# Altium PCB PCB1.PcbDoc (part 2 of 2)
Units mm, origin at the board's own origin, x right, y up, seen from the top; angles counter-clockwise.
Board outline 150 x 44.29 mm, 2 copper layers (Component Side, Solder Side), stack 0.772 mm thick; 82 components, 158 nets, 515 pads, 151 vias.
Unrouted connection lines stored in the file: 1.
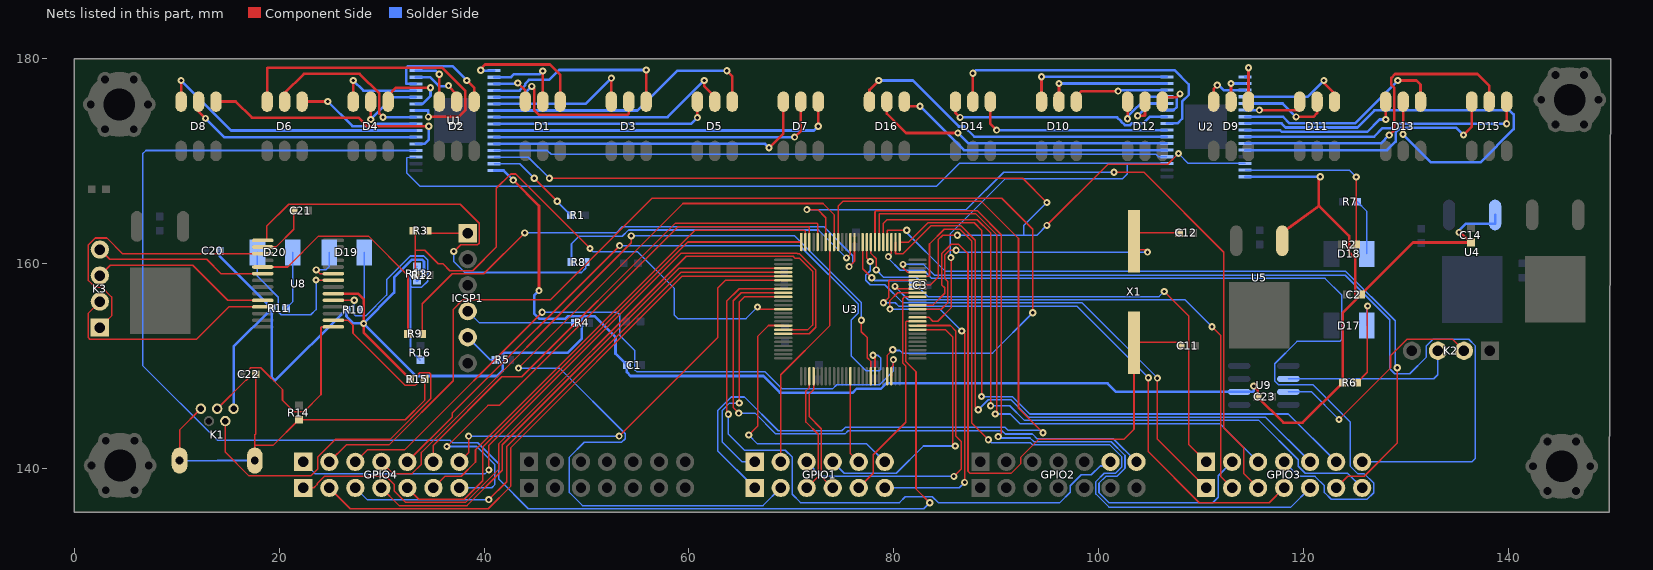
[diagram p2: the nets of this part, all layers, seen from the top]

## Via types
v1: diameter 0.7, hole 0.33, Component Side to Solder Side, 151 vias

## Nets (pads, with @x,y where several pads share a name; then routed paths per layer and width w, separated by ;. In a path a pad name is that pad's centre, name@x,y a point inside that pad or via, vN(x,y) a via of type N, cw(c..) or ccw(c..) an arc to the next point about the centre after c; other vN are vias at no path point) (continued)
MS13: GPIO2.12 U3.8 | length 63.8
  Component Side w0.152: v1(63.856,145.288) 63.678,145.466 63.678,156.312 64.916,157.55 U3.8@69.218,157.55
  Solder Side w0.152: v1(63.856,145.288) 63.838,145.27 63.838,143.365 65.42,141.783 69.406,141.783 70.079,141.11 70.079,137.477 70.895,136.661 80.558,136.661 81.133,137.236 83.757,137.236 84.331,136.661 96.225,136.661 97.231,137.668 97.231,138.303 98.298,139.37 99.289,139.37 100.152,140.233 100.749,140.233 GPIO2.12@101.155,140.64
MS14: GPIO2.14 U3.9 | length 57.5
  Component Side w0.152: v1(64.867,145.4) 64.328,145.939 64.328,156.362 65.115,157.15 U3.9@69.218,157.15
  Solder Side w0.152: v1(64.867,145.4) 66.446,145.4 68.483,143.363 75.233,143.363 75.556,143.686 90.553,143.686 90.882,143.358 93.534,143.358 93.986,142.906 101.429,142.906 GPIO2.14@103.695,140.64
NetC3_1: C3.1 U3.85 | length 8.2
  Component Side w0.152: U3.85@76.968,162.1 76.968,159.492 v1(77.847,158.614)
  Solder Side w0.152: v1(77.847,158.614) 78.113,158.348 81.428,158.348 C3.1@81.89,157.886
NetC11_1: C11.1 U3.64 X1.1 | length 63.5
  Component Side w0.152: U3.64@82.318,155.95 83.83,155.95 84.97,157.09 84.97,157.634 84.665,157.939 84.665,160.949 85.604,161.888 86.315,161.888 87.249,160.954 87.249,139.726 87.465,139.51 91.453,139.51 92.38,140.437 92.38,141.072 94.176,142.868 102.494,142.868 103.454,143.827 X1.1@103.454,152.286 103.454,152.298 108.026,152.298 C11.1@108.026,151.968
NetC12_1: C12.1 U3.63 X1.2 | length 35.5
  Component Side w0.152: U3.63@82.318,155.55 84.645,155.55 85.286,156.19 85.286,158.225 84.981,158.53 84.981,160.826 85.451,161.297 v1(86.086,161.297) ; v1(104.775,161.112) 104.521,161.366 103.454,161.366 X1.2@103.454,162.192 103.454,162.992 C12.1@107.848,162.992
  Solder Side w0.152: v1(86.086,161.297) 86.271,161.112 v1(104.775,161.112)
NetC21_1: C21.1 U8.2 | length 5.6
  Component Side w0.152: U8.2@18.394,161.614 19.685,161.614 21.412,163.341 C21.1@21.412,165.176
NetC22_1: C22.1 K1.5 K1.M1 K1.M2 R14.1 R15.2 | length 42.2
  Component Side w0.152: K1.M1@10.27,140.771 10.27,143.746 K1.5@12.345,145.821 ; K1.M2@17.62,140.771 17.62,142.215 ; C22.1@17.704,149.2 17.704,143.365 17.62,143.281 17.62,142.215 ; R15.2@34.188,148.717 34.188,146.634 32.309,144.755 R14.1@21.92,144.755 19.406,142.24 17.645,142.24 17.62,142.215
  Solder Side w0.152: K1.M1@10.27,140.771 10.27,140.767 13.945,140.767 13.949,140.771 K1.M2@17.62,140.771
NetD1_4: D1.4 U1.19 | length 4.5
  Component Side w0.254: v1(43.289,177.627) 44.027,176.89 D1.4@44.027,175.81
  Solder Side w0.254: U1.19@40.983,177.54 43.202,177.54 v1(43.289,177.627)
NetD1_5: D1.5 U1.18 | length 8
  Component Side w0.254: D1.5@45.727,175.81 v1(45.727,178.803)
  Solder Side w0.254: U1.18@40.983,178.19 42.627,178.19 42.924,178.487 45.41,178.487 v1(45.727,178.803)
NetD1_6: D1.6 U1.17 | length 12.6
  Component Side w0.254: v1(39.675,178.867) 39.849,178.867 39.698,179.017 40.114,179.433 46.431,179.433 47.429,178.435 D1.6@47.429,175.81
  Solder Side w0.254: v1(39.675,178.867) 39.702,178.84 U1.17@40.983,178.84
NetD2_4: D2.4 U1.16 | length 5.1
  Component Side w0.254: D2.4@35.627,175.81 v1(35.627,178.486)
  Solder Side w0.254: U1.16@33.338,178.84 35.273,178.84 v1(35.627,178.486)
NetD2_5: D2.5 U1.15 | length 5.5
  Component Side w0.254: v1(36.525,177.368) 36.525,177.317 37.327,176.516 D2.5@37.327,175.81
  Solder Side w0.254: U1.15@33.338,178.19 34.713,178.19 35.585,177.317 36.525,177.317 v1(36.525,177.368)
NetD2_6: D2.6 U1.14 | length 11.4
  Component Side w0.254: v1(38.318,177.876) 39.029,177.165 D2.6@39.029,175.81
  Solder Side w0.254: U1.14@33.338,177.54 32.436,177.54 32.418,177.558 32.418,179.107 32.584,179.273 36.921,179.273 v1(38.318,177.876)
NetD3_4: D3.4 U1.22 | length 14.8
  Component Side w0.254: D3.4@52.427,175.81 v1(52.427,178.105)
  Solder Side w0.254: U1.22@40.983,175.59 49.912,175.59 v1(52.427,178.105)
NetD3_5: D3.5 U1.21 | length 17.2
  Component Side w0.254: v1(44.653,177.292) 44.882,177.063 44.882,175.006 45.371,174.517 54.019,174.517 54.127,174.625 D3.5@54.127,175.81
  Solder Side w0.254: U1.21@40.983,176.24 43.601,176.24 v1(44.653,177.292)
NetD3_6: D3.6 U1.20 | length 18.8
  Component Side w0.254: D3.6@55.829,175.81 v1(55.829,178.892)
  Solder Side w0.254: U1.20@40.983,176.89 43.476,176.89 44.024,177.437 44.024,177.564 44.386,177.927 46.358,177.927 47.323,178.892 v1(55.829,178.892)
NetD4_4: D4.4 U1.13 | length 8.6
  Component Side w0.254: D4.4@27.227,175.81 v1(27.227,177.876)
  Solder Side w0.254: v1(27.227,177.876) 28.214,176.89 U1.13@33.338,176.89
NetD4_5: D4.5 U1.12 | length 7.1
  Component Side w0.254: D4.5@28.927,175.81 28.927,174.07 v1(28.931,174.066)
  Solder Side w0.254: v1(28.931,174.066) 31.104,176.24 U1.12@33.338,176.24
NetD4_6: D4.6 U1.11 | length 7.6
  Component Side w0.254: D4.6@30.629,175.81 30.629,176.374 31.42,177.165 v1(34.775,177.165)
  Solder Side w0.254: U1.11@33.338,175.59 33.985,175.59 34.775,176.38 v1(34.775,177.165)
NetD5_4: D5.4 U1.25 | length 21.7
  Component Side w0.254: v1(60.827,174.244) D5.4@60.827,175.81
  Solder Side w0.254: U1.25@40.983,173.64 60.223,173.64 v1(60.827,174.244)
NetD5_5: D5.5 U1.24 | length 24.5
  Component Side w0.254: v1(61.493,177.876) 61.493,177.317 62.527,176.284 D5.5@62.527,175.81
  Solder Side w0.254: U1.24@40.983,174.29 57.907,174.29 v1(61.493,177.876)
NetD5_6: D5.6 U1.23 | length 27.5
  Component Side w0.254: v1(63.703,178.816) 64.229,178.29 D5.6@64.229,175.81
  Solder Side w0.254: U1.23@40.983,174.94 54.975,174.94 58.852,178.816 v1(63.703,178.816)
NetD6_4: D6.4 U1.10 | length 31.1
  Component Side w0.254: D6.4@18.827,175.81 18.827,179.07 18.881,179.124 35.9,179.124 38.169,176.855 38.169,175.001 37.488,174.32 v1(34.569,174.32)
  Solder Side w0.254: U1.10@33.338,174.94 34.544,174.94 34.569,174.914 v1(34.569,174.32)
NetD6_5: D6.5 U1.9 | length 17.3
  Component Side w0.254: D6.5@20.527,175.81 20.527,176.635 22.409,178.518 27.857,178.518 29.769,176.606 29.769,174.65 v1(30.13,174.29)
  Solder Side w0.254: v1(30.13,174.29) U1.9@33.338,174.29
NetD6_6: D6.6 U1.8 | length 12.2
  Component Side w0.254: D6.6@22.229,175.81 22.229,175.819 v1(24.74,175.819)
  Solder Side w0.254: v1(24.74,175.819) 27.134,173.424 29.343,173.424 29.559,173.64 U1.8@33.338,173.64
NetD7_4: D7.4 U1.28 | length 32.1
  Component Side w0.254: v1(67.818,171.298) 69.227,172.707 D7.4@69.227,175.81
  Solder Side w0.254: U1.28@40.983,171.69 67.426,171.69 v1(67.818,171.298)
NetD7_5: D7.5 U1.27 | length 33.1
  Component Side w0.254: v1(70.315,172.34) 70.927,172.951 D7.5@70.927,175.81
  Solder Side w0.254: U1.27@40.983,172.34 v1(70.315,172.34)
NetD7_6: D7.6 U1.26 | length 34.2
  Component Side w0.254: v1(72.629,173.406) D7.6@72.629,175.81
  Solder Side w0.254: U1.26@40.983,172.99 72.213,172.99 v1(72.629,173.406)
NetD8_4: D8.4 U1.7 | length 27
  Component Side w0.254: D8.4@10.427,175.81 v1(10.427,177.876)
  Solder Side w0.254: v1(10.427,177.876) 15.314,172.99 U1.7@33.338,172.99
NetD8_5: D8.5 U1.6 | length 23.2
  Component Side w0.254: D8.5@12.127,175.81 12.127,174.842 v1(12.802,174.168)
  Solder Side w0.254: v1(12.802,174.168) 14.63,172.34 U1.6@33.338,172.34
NetD8_6: D8.6 U1.5 | length 24.5
  Component Side w0.254: D8.6@13.829,175.81 13.829,175.819 15.748,175.819 17.323,174.244 27.737,174.244 28.575,173.406 v1(34.595,173.406)
  Solder Side w0.254: U1.5@33.338,171.69 34.199,171.69 34.595,172.085 v1(34.595,173.406)
NetD9_4: D9.4 U2.19 | length 4.9
  Component Side w0.254: D9.4@111.227,175.81 111.227,177.064 v1(111.582,177.419)
  Solder Side w0.254: v1(111.582,177.419) 111.582,177.215 111.748,177.381 112.198,176.93 U2.19@114.313,176.93
NetD9_5: D9.5 U2.18 | length 3.2
  Component Side w0.254: D9.5@112.927,175.81 v1(112.927,177.58)
  Solder Side w0.254: v1(112.927,177.58) U2.18@114.313,177.58
NetD9_6: D9.6 U2.17 | length 4.5
  Component Side w0.254: D9.6@114.629,175.81 v1(114.629,179.119)
  Solder Side w0.254: U2.17@114.313,178.23 114.629,178.23 v1(114.629,179.119)
NetD10_4: D10.4 U2.16 | length 14.7
  Component Side w0.254: D10.4@94.427,175.81 v1(94.427,178.23)
  Solder Side w0.254: v1(94.427,178.23) U2.16@106.667,178.23
NetD10_5: D10.5 U2.15 | length 12.3
  Component Side w0.254: D10.5@96.127,175.81 v1(96.127,177.58)
  Solder Side w0.254: v1(96.127,177.58) U2.15@106.667,177.58
NetD10_6: D10.6 U2.14 | length 8.8
  Component Side w0.254: D10.6@98.019,176.632 98.146,176.632 98.349,176.835 v1(101.905,176.835)
  Solder Side w0.254: v1(101.905,176.835) 102,176.93 U2.14@106.667,176.93
NetD11_4: D11.4 U2.22 | length 6.1
  Component Side w0.254: v1(115.696,174.98) 119.627,174.981 D11.4@119.627,175.81
  Solder Side w0.254: U2.22@114.313,174.98 v1(115.696,174.98)
NetD11_5: D11.5 U2.21 | length 8.8
  Component Side w0.254: v1(119.278,174.32) 120.968,174.32 121.327,174.68 D11.5@121.327,175.81
  Solder Side w0.254: U2.21@114.313,175.63 117.969,175.63 v1(119.278,174.32)
NetD11_6: D11.6 U2.20 | length 10.8
  Component Side w0.254: v1(121.996,177.876) 121.996,177.622 123.029,176.59 D11.6@123.029,175.81
  Solder Side w0.254: U2.20@114.313,176.28 120.4,176.28 v1(121.996,177.876)
NetD12_4: D12.4 U2.13 | length 6.5
  Component Side w0.254: v1(102.819,174.142) 102.827,174.15 D12.4@102.827,175.81
  Solder Side w0.254: v1(102.819,174.142) 102.819,174.338 104.761,176.28 U2.13@106.667,176.28
NetD12_5: D12.5 U2.12 | length 5.4
  Component Side w0.254: v1(103.81,174.428) 104.496,174.428 104.527,174.459 D12.5@104.527,175.81
  Solder Side w0.254: v1(103.81,174.428) 105.012,175.63 U2.12@106.667,175.63
NetD12_6: D12.6 U2.11 | length 4.8
  Component Side w0.254: D12.6@106.229,175.81 106.229,176.251 107.632,176.251 v1(107.95,176.568)
  Solder Side w0.254: U2.11@106.667,174.98 107.315,174.98 107.632,175.298 107.632,176.251 v1(107.95,176.568)
NetD13_4: D13.4 U2.25 | length 16
  Component Side w0.254: v1(128.027,174.061) D13.4@128.027,175.81
  Solder Side w0.254: U2.25@114.313,173.03 117.712,173.03 117.874,172.868 126.235,172.868 127.427,174.061 v1(128.027,174.061)
NetD13_5: D13.5 U2.24 | length 45.1
  Component Side w0.254: v1(129.718,172.618) 129.727,172.628 D13.5@129.727,175.81
  Solder Side w0.254: U2.24@114.313,173.68 117.867,173.68 118.262,173.284 125.253,173.284 126.924,174.955 140.132,174.955 140.527,174.56 140.527,173.138 137.278,169.888 132.448,169.888 v1(129.718,172.618)
NetD13_6: D13.6 U2.23 | length 20.9
  Component Side w0.254: v1(129.21,177.876) 131.035,177.876 131.429,177.482 D13.6@131.429,175.81
  Solder Side w0.254: U2.23@114.313,174.33 114.33,174.33 118.025,174.315 118.649,173.691 125.024,173.691 v1(129.21,177.876)
NetD14_4: D14.4 U2.10 | length 22.6
  Component Side w0.254: D14.4@86.027,175.81 86.027,174.72 v1(86.474,174.272)
  Solder Side w0.254: v1(86.474,174.272) 101.812,174.272 102.19,173.895 102.19,173.882 102.558,173.513 103.08,173.513 103.282,173.715 104.364,173.715 104.978,174.33 U2.10@106.667,174.33
NetD14_5: D14.5 U2.9 | length 29.8
  Component Side w0.254: D14.5@87.727,175.81 v1(87.727,178.587)
  Solder Side w0.254: v1(87.727,178.587) 88.014,178.875 107.419,178.875 108.8,177.494 108.8,176.478 108.153,175.832 108.153,174.137 107.696,173.68 U2.9@106.667,173.68
NetD14_6: D14.6 U2.8 | length 19.7
  Component Side w0.254: D14.6@89.429,175.81 89.429,173.639 v1(90.038,173.03)
  Solder Side w0.254: v1(90.038,173.03) U2.8@106.667,173.03
NetD15_4: D15.4 U2.28 | length 26.6
  Component Side w0.254: v1(135.624,172.552) 136.427,173.355 D15.4@136.427,175.81
  Solder Side w0.254: U2.28@114.313,171.08 128.172,171.08 129.007,171.914 129.007,172.803 129.451,173.248 134.929,173.248 v1(135.624,172.552)
NetD15_5: D15.5 U2.27 | length 32.1
  Component Side w0.254: v1(128.372,172.542) 128.88,173.05 128.88,177.14 128.574,177.445 128.574,178.131 128.951,178.508 136.987,178.508 138.127,177.368 D15.5@138.127,175.81
  Solder Side w0.254: U2.27@114.313,171.73 127.559,171.73 v1(128.372,172.542)
NetD15_6: D15.6 U2.26 | length 28.2
  Component Side w0.254: v1(139.829,173.654) D15.6@139.829,175.81
  Solder Side w0.254: U2.26@114.313,172.38 126.891,172.38 127.735,173.223 128.578,173.223 129.009,173.654 v1(139.829,173.654)
NetD16_4: D16.4 U2.7 | length 32.9
  Component Side w0.254: D16.4@77.627,175.81 77.627,176.966 v1(78.537,177.876)
  Solder Side w0.254: v1(78.537,177.876) 81.863,177.876 86.36,173.379 86.863,173.379 87.862,172.38 U2.7@106.667,172.38
NetD16_5: D16.5 U2.6 | length 29.7
  Component Side w0.254: D16.5@79.327,175.81 79.327,174.625 81.207,172.745 v1(86.258,172.745)
  Solder Side w0.254: v1(86.258,172.745) 87.274,171.73 U2.6@106.667,171.73
NetD16_6: D16.6 U2.5 | length 27.9
  Component Side w0.254: D16.6@81.029,175.81 81.029,175.362 v1(82.559,175.362)
  Solder Side w0.254: v1(82.559,175.362) 86.841,171.08 U2.5@106.667,171.08
NetD17_A: D17.A R6.2 | length 9.9
  Component Side w0.152: R6.2@125.222,148.361 126.238,149.377 126.238,155.829 v1(126.263,155.854)
  Solder Side w0.152: D17.A@126.162,153.949 126.162,155.575 126.263,155.677 v1(126.263,155.854)
NetD18_A: D18.A R7.2 | length 5.5
  Solder Side w0.152: R7.2@125.247,166.04 126.162,165.125 D18.A@126.162,160.949
NetD19_A: D19.A R10.1 | length 5.9
  Solder Side w0.152: R10.1@27.965,155.499 28.305,155.499 D19.A@28.305,161.094
NetD19_K: D19.K U8.23 | length 4.6
  Component Side w0.152: v1(23.61,159.385) 23.982,159.014 U8.23@25.294,159.014
  Solder Side w0.152: v1(23.61,159.385) 24.558,159.385 24.876,159.702 D19.K@24.876,161.094
NetD20_A: D20.A R11.1 | length 5.7
  Solder Side w0.152: R11.1@20.676,155.626 21.305,156.255 D20.A@21.305,161.094
NetD20_K: D20.K U8.22 | length 15.5
  Component Side w0.152: v1(23.597,158.394) 23.627,158.364 U8.22@25.294,158.364
  Solder Side w0.152: D20.K@17.876,161.094 17.876,158.75 19.914,156.712 19.914,155.29 20.201,155.002 23.087,155.002 23.597,155.511 23.597,158.222 23.769,158.394 v1(23.597,158.394)
NetICSP1_1: ICSP1.1 R3.1 | length 4
  Component Side w0.152: R3.1@34.493,163.195 34.722,162.966 ICSP1.1@38.405,162.966
NetICSP1_4: ICSP1.4 R4.2 | length 10.9
  Solder Side w0.152: ICSP1.4@38.405,155.346 39.548,154.203 R4.2@48.87,154.203
NetICSP1_5: ICSP1.5 R5.1 | length 3.6
  Solder Side w0.152: ICSP1.5@38.405,152.806 40.615,150.597 R5.1@41.123,150.597
NetK1_2: K1.2 U8.16 | length 43.9
  Component Side w0.152: K1.2@14.745,144.621 14.745,141.567 17.048,139.264 23.084,139.264 23.749,139.929 23.749,141.097 25.476,142.824 30.81,142.824 34.804,146.818 34.804,149.198 34.66,149.342 33.721,149.342 33.426,149.047 33.426,148.26 33.265,148.098 32.305,148.098 27.203,153.2 27.203,153.987 26.727,154.464 U8.16@25.294,154.464
NetK1_3: K1.3 U8.15 | length 23.1
  Component Side w0.152: K1.3@13.945,145.821 16.713,148.59 16.79,148.59 17.069,148.869 17.069,149.657 17.23,149.818 18.196,149.818 20.32,147.694 20.32,146.661 21.445,145.536 22.41,145.536 24.079,147.206 24.079,153.788 24.105,153.814 U8.15@25.294,153.814
NetK2_2: K2.2 U9.7 | length 22.7
  Component Side w0.152: v1(123.469,144.78) 128.499,149.809 128.499,151.003 130.124,152.629 134.518,152.629 K2.2@135.661,151.486
  Solder Side w0.152: U9.7@118.529,147.472 120.777,147.472 v1(123.469,144.78)
NetK2_3: K2.3 U9.6 | length 17.1
  Solder Side w0.152: U9.6@118.529,148.742 132.715,148.742 133.121,149.149 K2.3@133.121,151.486
NetK3_1: K3.1 U8.3 | length 27.8
  Component Side w0.152: K3.1@2.489,153.746 3.632,154.889 3.632,156.743 2.692,157.683 2.032,157.683 1.372,158.344 1.372,161.832 2.036,162.497 3.179,162.497 4.712,160.964 U8.3@18.394,160.964
NetK3_2: K3.2 U8.11 | length 22.4
  Component Side w0.152: K3.2@2.489,156.286 1.372,155.169 1.372,152.756 1.515,152.612 11.921,152.612 15.073,155.764 U8.11@18.394,155.764
NetK3_3: K3.3 U8.10 | length 17.7
  Component Side w0.152: K3.3@2.489,158.826 3.505,159.842 11.557,159.842 14.985,156.414 U8.10@18.394,156.414
NetK3_4: K3.4 U8.6 | length 16.9
  Component Side w0.152: K3.4@2.489,161.366 3.447,160.408 12.921,160.408 14.316,159.014 U8.6@18.394,159.014
NetR1_1: R1.1 U1.31 | length 9.6
  Component Side w0.152: v1(44.907,168.326) v1(47.142,166.091)
  Solder Side w0.152: U1.31@40.983,169.74 43.493,169.74 v1(44.907,168.326) ; v1(47.142,166.091) 47.142,166.04 R1.1@48.463,164.719
NetR2_1: R2.1 U2.31 | length 17.7
  Component Side w0.152: R2.1@125.146,161.849 v1(125.146,168.453)
  Solder Side w0.152: U2.31@114.313,169.13 124.469,169.13 v1(125.146,168.453)
NetR8_1: R8.1 U8.1 | length 44.2
  Component Side w0.152: U8.1@18.394,162.264 18.796,162.264 18.796,163.661 20.926,165.791 37.682,165.791 39.532,163.941 39.532,161.985 39.37,161.823 37.719,161.823 37.033,161.138 v1(37.033,161.188)
  Solder Side w0.152: v1(37.033,161.188) 37.033,160.198 38.107,159.124 49.523,159.124 49.936,159.537 R8.1@49.936,160.147
NetR9_1: R9.1 U8.5 | length 22.7
  Component Side w0.152: U8.5@18.394,159.664 20.827,159.664 23.845,162.681 28.708,162.681 32.575,158.814 R9.1@32.575,153.137
NetR13_2: R13.2 R16.1 U8.19 | length 28
  Component Side w0.152: U8.19@25.294,156.414 v1(27.33,156.414)
  Solder Side w0.152: v1(27.33,156.414) 27.33,155.042 27.483,154.889 28.448,154.889 30.48,156.921 30.48,158.427 32.789,160.736 34.11,160.736 34.505,160.341 34.505,158.284 33.926,157.705 32.96,157.705 32.817,157.848 ; R13.2@33.452,159.715 32.817,159.08 32.817,157.848 ; R16.1@33.782,150.571 32.817,151.536 32.817,157.848
PIC32_MCLR: R3.2 R12.2 U3.13 | length 56.1
  Component Side w0.152: R12.2@33.299,158.877 33.299,161.29 ; R3.2@33.299,162.992 33.299,161.29 ; v1(50.343,161.468) 50.343,161.493 43.095,168.741 42.6,168.741 41.199,167.34 41.199,161.62 38.887,159.309 36.652,159.309 35.992,159.969 35.535,159.969 34.214,161.29 33.299,161.29 ; v1(66.7,155.753) 66.904,155.55 U3.13@69.218,155.55
  Solder Side w0.152: v1(50.343,161.468) 50.648,161.163 54.991,161.163 58.547,157.607 58.547,154.991 58.906,154.632 65.579,154.632 v1(66.7,155.753)
PIC32_RXD: R8.2 U3.88 | length 32
  Component Side w0.152: v1(75.387,160.553) 75.768,160.934 U3.88@75.768,162.1
  Solder Side w0.152: R8.2@48.539,160.147 48.539,161.925 49.276,162.662 53.491,162.662 54.108,163.278 72.662,163.278 v1(75.387,160.553)
PIC32_TXD: R9.2 U3.87 | length 53.1
  Component Side w0.152: R9.2@33.972,153.137 33.972,156.07 36.906,159.004 39.98,159.004 v1(43.967,162.992) ; v1(75.645,159.702) 76.168,160.225 U3.87@76.168,162.1
  Solder Side w0.152: v1(43.967,162.992) 52.894,162.992 53.487,163.584 73.178,163.584 75.997,160.765 75.997,160.054 v1(75.645,159.702)
RA1: GPIO1.11 U3.17 | length 27.3
  Component Side w0.152: v1(65.837,143.256) 66.7,144.12 66.7,152.883 67.767,153.95 U3.17@69.218,153.95
  Solder Side w0.152: v1(65.837,143.256) 66.7,142.392 77.368,142.392 GPIO1.11@79.121,140.64
RA2: GPIO1.9 U3.38 | length 8.7
  Component Side w0.152: U3.38@75.768,149 75.768,141.453 GPIO1.9@76.581,140.64
RA3: GPIO1.7 U3.58 | length 28
  Component Side w0.152: U3.58@82.318,153.55 85.031,153.55 85.75,152.83 85.75,142.443 v1(86.004,142.189)
  Solder Side w0.152: GPIO1.7@74.041,140.64 75.159,139.522 80.239,139.522 82.906,142.189 v1(86.004,142.189)
RA4: GPIO1.5 U3.59 | length 33.6
  Component Side w0.152: U3.59@82.318,153.95 85.529,153.95 86.061,153.418 86.061,143.169 86.6,142.631 86.6,139.952 v1(85.865,139.217)
  Solder Side w0.152: GPIO1.5@71.501,140.64 72.923,139.217 v1(85.865,139.217)
RA5: GPIO1.3 U3.93 | length 23.5
  Component Side w0.152: GPIO1.3@68.961,140.64 68.961,149.145 73.768,153.952 U3.93@73.768,162.1
RA6: GPIO1.1 U3.10 | length 23.4
  Component Side w0.152: v1(64.922,146.38) 64.922,156.235 65.437,156.75 U3.10@69.218,156.75
  Solder Side w0.152: v1(64.922,146.38) 63.97,146.38 63.269,145.68 63.269,142.551 65.181,140.64 GPIO1.1@66.421,140.64
RA7: GPIO1.2 U3.91 | length 85.8
  Component Side w0.152: U3.91@74.568,162.1 74.568,165.618 75.017,166.067 88.555,166.067 92.177,162.446 92.177,145.872 v1(94.564,143.485)
  Solder Side w0.152: GPIO1.2@66.421,138.1 62.814,141.707 62.814,145.659 64.125,146.97 65.418,146.97 68.72,143.668 74.928,143.668 75.262,144.002 90.886,144.002 91.155,143.732 94.317,143.732 v1(94.564,143.485)
RA8: GPIO1.4 U3.92 | length 85.7
  Component Side w0.152: v1(43.358,149.796) 59.421,165.86 73.091,165.86 74.168,164.782 U3.92@74.168,162.1
  Solder Side w0.152: v1(43.358,149.796) 47.366,149.796 53.775,143.387 53.775,142.904 53.416,142.545 49.774,142.545 48.331,141.102 48.331,137.648 49.606,136.373 67.234,136.373 GPIO1.4@68.961,138.1
RA9: GPIO1.6 U3.28 | length 12
  Component Side w0.152: GPIO1.6@71.501,138.1 72.619,139.217 72.619,143.332 71.427,144.524 71.427,147.559 71.768,147.9 U3.28@71.768,149
RA10: GPIO1.8 U3.29 | length 12
  Component Side w0.152: U3.29@72.168,149 72.168,147.691 71.737,147.26 71.737,145.059 72.923,143.872 72.923,139.217 GPIO1.8@74.041,138.1
RA11: GPIO1.10 U3.66 | length 22
  Component Side w0.152: GPIO1.10@76.581,138.1 78.003,139.522 78.003,141.338 81.161,144.496 81.161,150.004 80.874,150.292 80.874,156.57 81.053,156.75 U3.66@82.318,156.75
RA12: GPIO1.12 U3.67 | length 34.7
  Component Side w0.152: v1(79.629,155.55) 79.629,156.388 80.391,157.15 U3.67@82.318,157.15 ; v1(86.639,153.416) 86.919,153.137 v1(86.919,138.633)
  Solder Side w0.152: GPIO1.12@79.121,138.1 86.385,138.1 v1(86.919,138.633) ; v1(79.629,155.55) 79.635,155.544 84.511,155.544 v1(86.639,153.416)
RD1: GPIO3.13 U3.72 | length 89.5
  Component Side w0.152: v1(80.899,159.918) 80.899,159.601 81.35,159.15 U3.72@82.318,159.15
  Solder Side w0.152: v1(80.899,159.918) 82.911,159.918 83.978,158.852 124.084,158.852 128.422,154.514 128.422,149.733 128.907,149.248 130.38,149.248 132.004,150.871 132.004,151.964 132.65,152.61 136.13,152.61 136.79,151.95 136.79,140.981 136.449,140.64 GPIO3.13@125.73,140.64
RD2: GPIO3.11 U3.76 | length 62.6
  Component Side w0.152: U3.76@80.568,162.1 81.455,162.1 83.331,163.976 87.851,163.976 88.57,163.258 v1(88.57,147.022)
  Solder Side w0.152: v1(88.57,147.022) 88.577,147.015 91.571,147.015 93.273,145.313 118.516,145.313 GPIO3.11@123.19,140.64
RD3: GPIO3.9 U3.77 | length 62.6
  Component Side w0.152: U3.77@80.168,162.1 80.168,160.985 80.186,160.967 80.906,160.967 83.608,163.669 86.577,163.669 87.96,162.286 87.96,146.017 v1(88.245,145.732)
  Solder Side w0.152: v1(88.245,145.732) 89.215,146.702 91.442,146.702 93.157,144.988 116.302,144.988 GPIO3.9@120.65,140.64
RD4: GPIO3.7 U3.78 | length 89.2
  Component Side w0.152: v1(79.477,160.68) 79.768,160.972 U3.78@79.768,162.1
  Solder Side w0.152: v1(79.477,160.68) 79.477,160.503 80.645,159.334 82.931,159.334 83.718,158.547 122.105,158.547 123.729,156.923 123.729,152.58 123.549,152.4 119.358,152.4 117.185,150.227 117.185,148.525 117.526,148.184 120.904,148.184 124.587,144.501 124.587,140.196 125.286,139.497 125.921,139.497 126.854,138.564 126.854,137.624 126.208,136.977 122.712,136.977 122.047,137.643 122.047,138.303 121.133,139.217 119.532,139.217 GPIO3.7@118.11,140.64
RD5: GPIO3.5 U3.81 | length 60.2
  Component Side w0.152: U3.81@78.568,162.1 78.6,164.845 88.024,164.845 90.042,162.827 90.042,145.439 v1(89.916,145.313)
  Solder Side w0.152: v1(89.916,145.313) 91.363,145.313 92.298,144.378 111.831,144.378 GPIO3.5@115.57,140.64
RD6: GPIO3.3 U3.82 | length 70.9
  Component Side w0.152: U3.82@78.168,162.1 78.168,165.032 78.286,165.15 88.166,165.15 90.499,162.817 90.499,143.41 v1(90.194,143.105)
  Solder Side w0.152: v1(90.194,143.105) 90.329,142.97 93.312,142.97 93.681,142.601 101.239,142.601 102.578,141.262 102.578,140.018 101.778,139.217 100.686,139.217 100.038,138.57 100.038,137.63 101.021,136.647 111.145,136.647 111.684,137.185 111.684,139.294 GPIO3.3@113.03,140.64
RD7: GPIO3.1 U3.83 | length 51.1
  Component Side w0.152: U3.83@77.768,162.1 77.768,160.985 78.283,160.471 v1(78.283,159.385) ; v1(106.401,157.277) 108.814,154.864 108.814,142.316 GPIO3.1@110.49,140.64
  Solder Side w0.152: v1(78.283,159.385) 78.994,158.674 82.194,158.674 82.55,158.318 82.55,157.531 83.306,156.774 105.898,156.774 v1(106.401,157.277)
RD8: GPIO3.2 U3.84 | length 49.2
  Component Side w0.152: U3.84@77.368,162.1 77.368,160.536 v1(77.699,160.206) ; v1(105.74,148.817) 105.74,142.85 GPIO3.2@110.49,138.1
  Solder Side w0.152: v1(77.699,160.206) 77.699,159.306 77.268,158.875 77.268,158.367 77.698,157.937 79.109,157.937 80.893,156.154 98.403,156.154 v1(105.74,148.817)
RD9: GPIO3.4 U3.68 | length 51.4
  Component Side w0.152: v1(80.12,157.769) 80.34,157.55 U3.68@82.318,157.55 ; v1(111.074,153.822) 111.912,152.984 111.912,139.217 GPIO3.4@113.03,138.1
  Solder Side w0.152: v1(80.12,157.769) 81.42,156.47 108.427,156.47 v1(111.074,153.822)
RD10: GPIO3.6 U3.94 | length 74.4
  Component Side w0.152: v1(71.514,165.265) 72.581,165.265 73.368,164.477 U3.94@73.368,162.1 ; v1(101.498,168.91) 104.419,168.91 112.217,161.112 112.217,143.967 114.173,142.011 114.173,139.497 GPIO3.6@115.57,138.1
  Solder Side w0.152: v1(71.514,165.265) 87.084,165.265 90.729,168.91 v1(101.498,168.91)
RD11: GPIO3.8 U3.70 | length 57.2
  Component Side w0.152: v1(78.983,156.177) 79.525,156.72 79.525,158.322 79.553,158.35 U3.70@82.318,158.35 ; v1(104.864,148.844) 104.864,141.618 109.83,136.652 116.662,136.652 GPIO3.8@118.11,138.1
  Solder Side w0.152: v1(78.983,156.177) 80.14,156.177 80.469,155.849 97.859,155.849 v1(104.864,148.844)
RD12: GPIO3.10 U3.71 | length 70.8
  Component Side w0.152: U3.71@82.318,158.75 83.439,158.75 83.49,158.8 83.49,161.913 84.931,163.354 86.455,163.354 87.605,162.204 87.605,144.437 v1(89.243,142.799)
  Solder Side w0.152: v1(89.243,142.799) 89.548,142.494 93.355,142.494 93.558,142.291 101.105,142.291 102.273,141.122 102.273,140.157 101.638,139.522 100.546,139.522 99.733,138.709 99.733,137.49 101.003,136.22 118.77,136.22 GPIO3.10@120.65,138.1
RD13: GPIO3.12 U3.79 | length 74.3
  Component Side w0.152: U3.79@79.368,162.1 79.368,163.22 79.394,163.246 v1(81.267,163.246) ; GPIO3.12@123.19,138.1 124.333,139.243 125.933,139.243 129.159,142.469 v1(129.159,149.835)
  Solder Side w0.152: v1(81.267,163.246) 81.267,163.017 85.052,159.233 124.135,159.233 128.956,154.411 128.956,150.038 v1(129.159,149.835)
RD14: GPIO3.14 U3.80 | length 69.8
  Component Side w0.152: U3.80@78.968,162.1 78.968,163.909 79.345,164.286 88.151,164.286 89.459,162.979 v1(89.459,146.113)
  Solder Side w0.152: v1(89.459,146.113) 91.331,146.113 92.761,144.683 115.654,144.683 119.482,140.856 119.482,140.221 120.18,139.522 124.308,139.522 GPIO3.14@125.73,138.1
RE1: GPIO4.13 U3.98 | length 56.8
  Component Side w0.152: v1(36.373,142.138) 40.386,146.152 41.491,146.152 58.953,163.614 71.768,163.614 U3.98@71.768,162.1
  Solder Side w0.152: v1(36.373,142.138) 39.294,142.138 41.065,140.367 41.065,138.423 40.742,138.1 GPIO4.13@37.592,138.1
RE2: GPIO4.11 U3.99 | length 48.5
  Component Side w0.152: GPIO4.11@35.052,138.1 36.195,139.243 37.782,139.243 39.167,140.627 39.167,141.821 60.58,163.234 71.278,163.234 71.368,163.144 U3.99@71.368,162.1
RE3: GPIO4.9 U3.100 | length 51.3
  Component Side w0.152: GPIO4.9@32.512,138.1 33.63,136.982 38.066,136.982 39.878,138.795 39.878,142.097 59.884,162.103 70.968,162.103 U3.100@70.968,162.1
RE4: GPIO4.7 U3.3 | length 51
  Component Side w0.152: GPIO4.7@29.972,138.1 31.699,136.373 38.333,136.373 41.783,139.823 41.783,142.312 59.02,159.55 U3.3@69.218,159.55
RE5: GPIO4.5 U3.4 | length 53.5
  Component Side w0.152: v1(40.462,136.957) 42.204,138.698 42.204,142.127 59.226,159.15 U3.4@69.218,159.15
  Solder Side w0.152: GPIO4.5@27.432,138.1 28.575,136.957 v1(40.462,136.957)
RE6: GPIO4.3 U3.5 | length 56.8
  Component Side w0.152: GPIO4.3@24.892,138.1 26.924,136.068 40.411,136.068 42.621,138.278 42.621,142.037 59.334,158.75 U3.5@69.218,158.75
RE7: GPIO4.1 U3.18 | length 72
  Component Side w0.152: GPIO4.1@22.352,138.1 23.368,138.1 23.698,138.43 23.698,138.506 24.417,139.225 30.435,139.225 31.242,138.417 31.242,137.782 32.347,136.677 38.193,136.677 41.453,139.937 41.453,142.426 59.734,160.708 70.178,160.708 70.358,160.528 70.79,160.528 72.071,159.247 72.071,153.999 71.622,153.55 U3.18@69.218,153.55
RE8: GPIO4.2 U3.19 | length 70.5
  Component Side w0.152: v1(40.475,139.84) 40.475,142.252 59.237,161.014 70.558,161.014 70.612,160.96 70.79,160.96 72.378,159.371 72.378,153.778 71.75,153.15 U3.19@69.218,153.15
  Solder Side w0.152: GPIO4.2@22.352,140.64 23.495,139.497 40.132,139.497 v1(40.475,139.84)
RE9: GPIO4.4 U3.47 | length 111.2
  Component Side w0.152: GPIO4.4@24.892,140.64 26.543,142.291 30.709,142.291 36.982,148.565 36.982,155.524 37.922,156.464 46.482,156.464 56.401,166.383 90.538,166.383 93.574,163.347 v1(93.574,155.194) ; U3.47@79.368,149 79.35,150.001 79.35,151.028 v1(79.908,151.587)
  Solder Side w0.152: v1(79.908,151.587) 79.832,151.511 80.594,151.511 80.848,151.257 89.637,151.257 v1(93.574,155.194)
RE10: GPIO4.6 U3.48 | length 67
  Component Side w0.152: GPIO4.6@27.432,140.64 28.6,141.808 32.233,141.808 v1(45.669,155.245) ; U3.48@79.768,149 79.82,149.051 79.82,149.924 79.934,150.038 v1@79.934,150.393
  Solder Side w0.152: v1(45.669,155.245) 52.984,155.245 53.238,154.991 53.238,152.984 54.712,151.511 54.712,149.631 54.889,149.454 67.412,149.454 69.102,147.763 74.027,147.763 74.422,148.158 78.613,148.158 79.934,149.479 v1@79.934,150.393
  other v1: 79.959,150.622
RE11: GPIO4.8 U3.43 | length 68.3
  Component Side w0.152: GPIO4.8@29.972,140.64 31.115,139.497 32.969,139.497 33.884,140.411 33.884,141.554 54.369,162.039 v1(54.369,162.7) ; v1(76.835,154.457) 76.835,153.351 77.399,152.787 77.399,150.813 77.768,150.444 U3.43@77.768,149
  Solder Side w0.152: v1(54.369,162.7) 70.34,162.7 76.835,156.204 v1(76.835,154.457)
RE12: GPIO4.10 U3.44 | length 68.3
  Component Side w0.152: GPIO4.10@32.512,140.64 36.896,145.024 36.896,145.405 v1(53.238,161.747) ; v1(77.978,151.054) 78.168,150.864 U3.44@78.168,149
  Solder Side w0.152: v1(53.238,161.747) 70.829,161.747 76.525,156.052 76.525,155.163 75.842,154.481 75.842,150.985 77.274,149.553 78.617,149.553 78.743,149.679 78.743,150.746 78.435,151.054 v1(77.978,151.054)
RE13: GPIO4.12 U3.96 | length 49.9
  Component Side w0.152: GPIO4.12@35.052,140.64 35.052,142.268 41.724,148.94 43.67,148.94 58.65,163.92 72.514,163.92 72.568,163.866 U3.96@72.568,162.1
RE14: GPIO4.14 U3.6 | length 42.7
  Component Side w0.152: GPIO4.14@37.592,140.64 38.494,141.542 v1(38.494,143.154) ; v1(53.188,143.154) 62.794,152.761 62.794,157.587 63.557,158.35 U3.6@69.218,158.35
  Solder Side w0.152: v1(38.494,143.154) v1(53.188,143.154)
SOUT: U1.29 U2.4 | length 65.9
  Solder Side w0.152: U1.29@40.983,171.04 46.181,171.04 46.558,170.663 105.609,170.663 105.842,170.43 U2.4@106.667,170.43
SPI_1_CLK: U1.3 U2.3 U3.61 | length 110.1
  Component Side w0.152: U3.61@82.318,154.75 83.439,154.75 83.816,154.372 84.299,154.372 85.598,155.672 85.598,160.553 v1(85.573,160.579)
  Solder Side w0.152: U1.3@33.338,170.39 32.436,170.339 32.436,168.866 33.747,167.554 84.166,167.554 86.392,169.78 102.794,169.78 ; v1(85.573,160.579) 85.501,160.651 85.501,162.886 90.915,168.3 102.362,168.3 102.794,168.732 102.794,169.78 ; U2.3@106.667,169.78 102.794,169.78
SPI_1_IN: U1.4 U3.60 | length 151
  Component Side w0.152: U3.60@82.318,154.35 81.204,154.35 81.186,154.332 81.186,150.411 82.169,149.428 82.169,137.998 v1(83.515,136.652)
  Solder Side w0.152: U1.4@33.338,171.04 6.985,171.04 6.66,170.715 6.66,150.052 13.964,142.748 36.671,142.748 36.925,142.494 39.388,142.494 41.427,140.454 41.427,138.956 44.315,136.068 82.931,136.068 v1(83.515,136.652)
SPI_LATCH: U1.30 U2.30 U3.69 | length 99.8
  Component Side w0.152: v1(46.38,168.326) 92.583,168.326 v1(94.945,165.964) ; U3.69@82.318,157.95 83.606,157.95 84.328,158.672 84.328,162.319 84.772,162.763 v1(86.208,162.763) ; v1(94.945,163.728) 100.914,169.697 106.756,169.697 v1(107.798,170.739)
  Solder Side w0.152: U1.30@40.983,170.39 44.317,170.39 v1(46.38,168.326) ; v1(86.208,162.763) 92.685,162.763 ; v1(94.945,163.728) 93.98,162.763 92.685,162.763 ; v1(94.945,165.964) 92.685,163.703 92.685,162.763 ; v1(107.798,170.739) 108.756,169.78 U2.30@114.313,169.78
VCC: C1.1 C2.1 C14.1 C20.1 C23.1 K1.1 R6.1 R10.2 R11.2 R13.1 R15.1 U1.32 U2.32 U4.3 U5.1 U8.20 U9.2 | length 249.9
  Component Side w0.254: U8.20@25.294,157.064 27.709,157.064 28.245,156.528 v1(28.245,154.153) 28.245,153.264 R15.1@32.791,148.717 ; v1(42.85,168.148) 45.364,165.633 v1(45.364,157.353) ; v1(115.138,148.031) 115.519,147.65 C23.1@115.519,146.99 118.046,144.463 119.926,144.463 R6.1@123.825,148.361 123.825,155.169 C2.1@125.628,156.972 ; U5.1@118.237,163.246 121.533,165.634 ; v1(121.641,168.48) 121.488,168.328 121.488,165.679 124.46,162.707 124.46,161.112 125.044,160.528 125.044,156.997 125.07,156.972 C2.1@125.628,156.972 ; v1(135.179,163.043) 135.179,163.22 135.204,163.246 135.204,163.195 C14.1@136.347,162.052 ; C14.1@136.042,162.052 130.708,162.052 C2.1@125.628,156.972
  Solder Side w0.254: C20.1@14.199,161.239 14.199,160.706 R11.2@19.279,155.626 ; K1.1@15.545,145.821 15.545,151.892 R11.2@19.279,155.626 ; v1(28.245,154.153) 33.376,149.022 41.275,149.022 41.808,149.555 41.846,151.282 48.146,151.282 49.555,152.692 49.581,154.864 ; R13.1@33.452,158.318 34.138,159.004 34.138,160.198 33.958,160.377 32.942,160.377 31.217,158.652 31.217,157.153 28.216,154.153 27.249,154.153 26.568,154.834 R10.2@26.568,155.499 19.583,148.565 19.279,148.869 R11.2@19.279,155.626 ; U1.32@40.983,169.09 41.908,169.09 v1(42.85,168.148) ; v1(45.364,157.353) 44.882,156.87 44.882,155.118 45.387,154.612 47.958,154.612 48.209,154.864 49.581,154.864 ; U2.32@114.313,168.48 v1(121.641,168.48) ; v1(115.138,148.031) 115.138,147.498 115.113,147.472 U9.2@113.729,147.472 101.702,147.472 100.876,148.298 79.256,148.298 78.735,147.777 76.378,147.777 76.001,147.4 68.881,147.4 67.259,149.022 54.318,149.022 53.95,149.39 C1.1@53.95,150.089 52.832,151.206 52.832,152.806 50.775,154.864 49.581,154.864 ; v1(135.179,163.043) 135.179,163.22 135.839,163.881 138.714,163.881 U4.3@138.714,164.744
pads on no net: C21.2 ICSP1.6 K1.4 R12.1 U2.29 U3.1 U3.12 U3.73 U3.74 U3.95 U3.97 U4.2 U6.2 U7.2 U8.8 U8.9 U8.12 U8.13 U8.14 U8.17 U8.24 U8.27 U8.28 U9.5

## Polygon pours and split planes (outlines as drawn)
GND on Solder Side "Component Side-No Net1" (solid, shelved, pour order 6): 0,180 150,180 149.86,135.712 0,135.712
GND on Component Side "Component Side-No Net" (solid, shelved, pour order 4): 0,180 150,180 149.86,135.712 0,135.712

## Keep-outs
Keep-Out Layer:
  lines w0.254: 0,135.026 150.673,135.026 150.673,179.047 149.101,180.619 0,180.619 0,135.026

## Dimensions
0,180 to 150.254,180 on Mechanical 13
150,180 to 149.86,135.712 on Mechanical 13
145.212,140.208 to 146,176 on Mechanical 13
146,176 to 4.394,175.539 on Mechanical 13

## Text inside footprints (layer, text, board x,y; h text height)
U1: Mechanical 1 "*" at 33.084,167.642 h1.27 r180; Bottom Overlay "*" at 33.084,167.642 h1.27 r180
U2: Mechanical 1 "*" at 106.413,167.032 h1.27 r180; Bottom Overlay "*" at 106.413,167.032 h1.27 r180